# EAGLE board usb-wildcard-r2-panel (EAGLE 5.12)
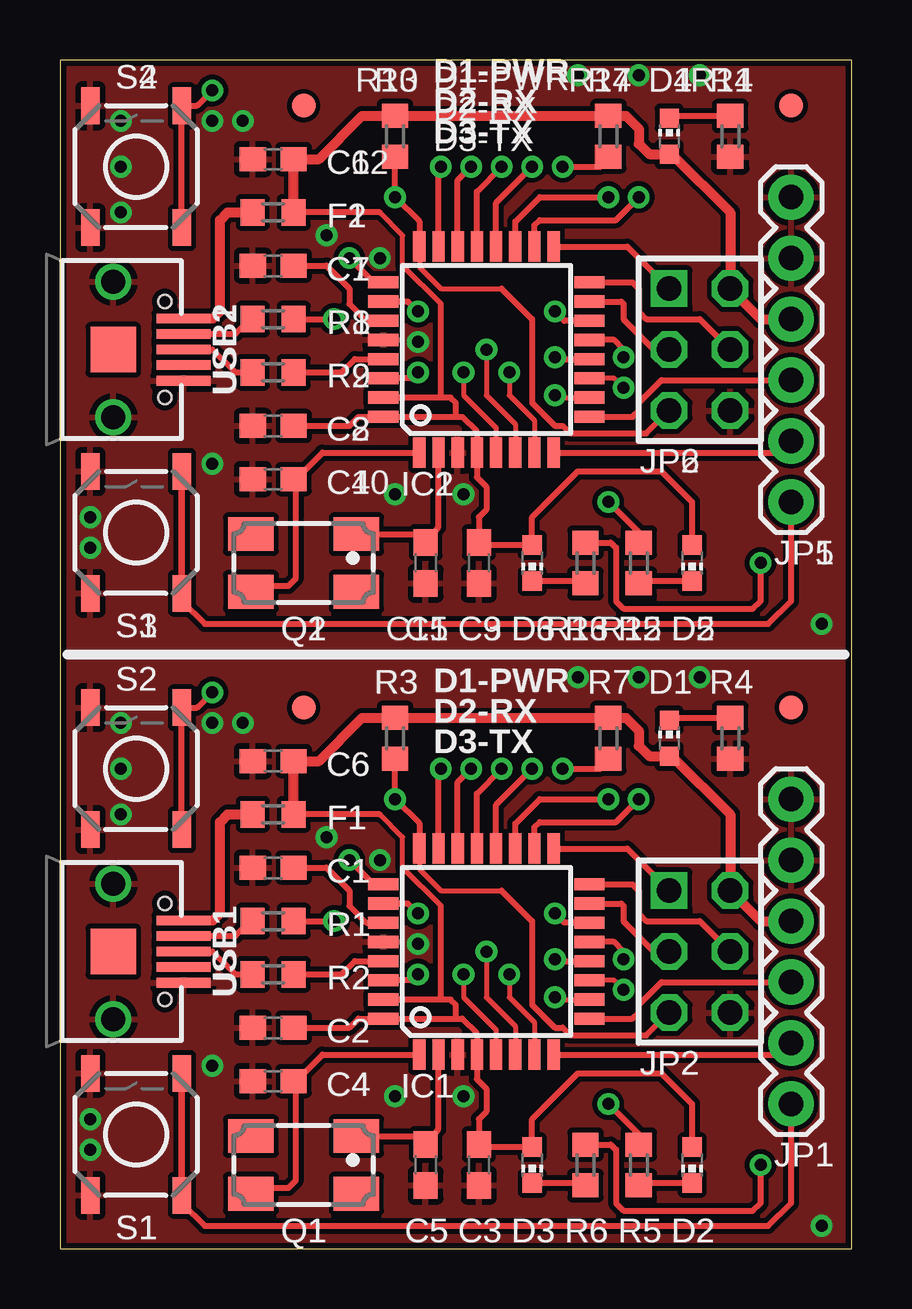
[diagram p0: board, top side]
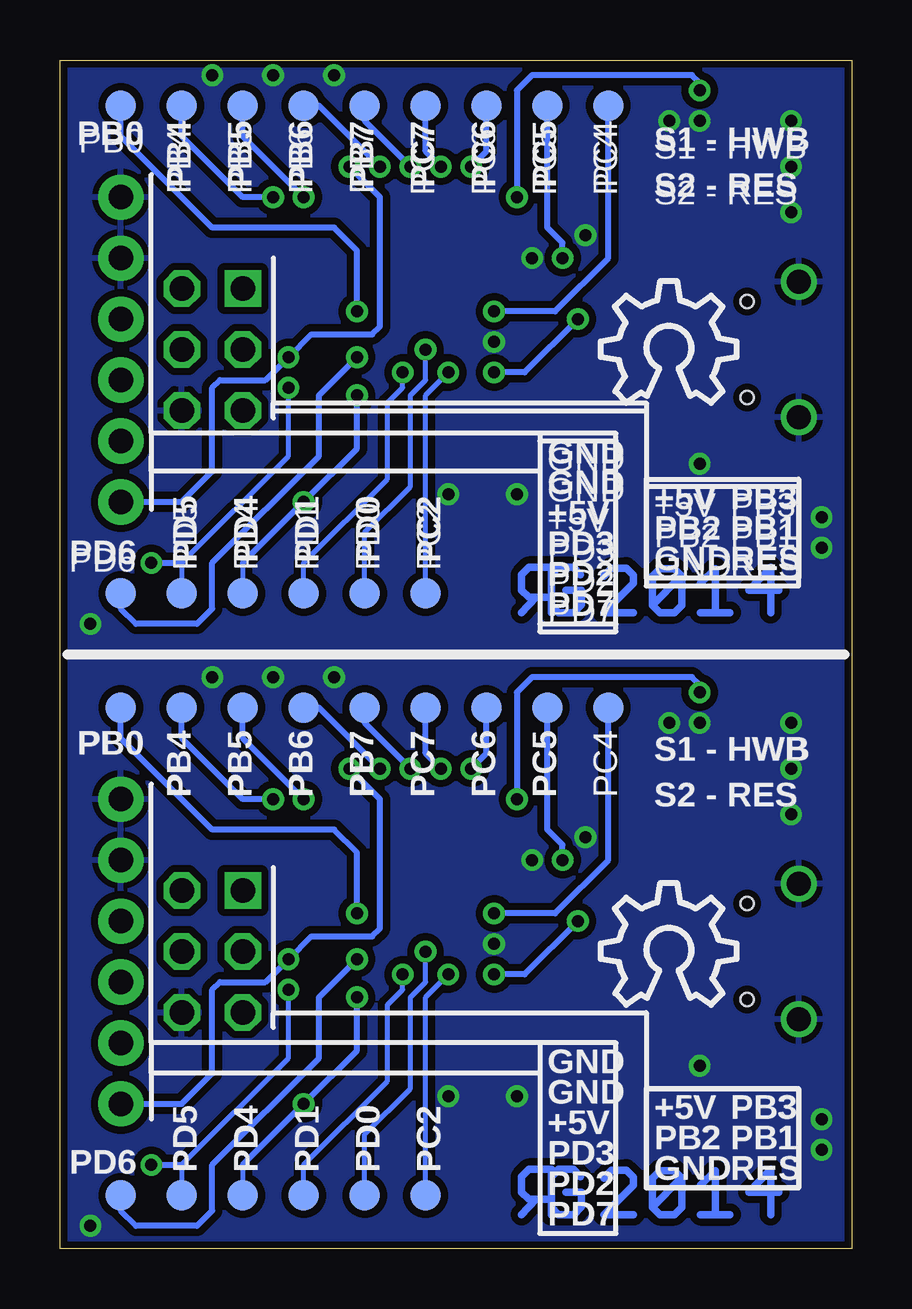
[diagram p1: board, bottom side, seen from below]

Size 33.02 x 49.53 mm. Coordinates in mm from the lower left corner, seen from the top.
Outline: 0,0 33.02,0 33.02,49.53 0,49.53 0,0
Copper layers (1*16): Top 0.035mm / dielectric 1.5mm / Bottom 0.035mm
Design rules "default *": minimum track width 8mil, minimum drill 19mil, track to track 8mil, track to pad 8mil, pad to pad 8mil, via to via 8mil, smd to smd 8mil, copper to edge 10mil, drill to drill 8mil, minimum pad ring 10mil, minimum via ring 8mil, stop-mask expansion 4mil, vias tented up to drill 20mil, thermal gap 10mil

## Footprints (pad centres in the part's own frame; a part is rotated, then mirrored left to right if it is on the bottom)
C0603 = smd 1.1 x 1: 1 -0.85,0; 2 0.85,0
CHIP-LED0603 = smd 0.8 x 0.8: A 0,-0.75; C 0,0.75
R0603 = smd 1 x 1.1: 1 -0.85,0; 2 0.85,0
TQFP32-08 = smd 1.27 x 0.508: 1 -4.293,2.8; 2 -4.293,2; 3 -4.293,1.2; 4 -4.293,0.4; 5 -4.293,-0.4; 6 -4.293,-1.2; 7 -4.293,-2; 8 -4.293,-2.8; 17 4.293,-2.8; 18 4.293,-2; 19 4.293,-1.2; 20 4.293,-0.4; 21 4.293,0.4; 22 4.293,1.2; 23 4.293,2; 24 4.293,2.8 | smd 0.508 x 1.27: 9 -2.8,-4.293; 10 -2,-4.293; 11 -1.2,-4.293; 12 -0.4,-4.293; 13 0.4,-4.293; 14 1.2,-4.293; 15 2,-4.293; 16 2.8,-4.293; 25 2.8,4.293; 26 2,4.293; 27 1.2,4.293; 28 0.4,4.293; 29 -0.4,4.293; 30 -1.2,4.293; 31 -2,4.293; 32 -2.8,4.293
FTDI_BASIC = drill 1.016 pad 1.88 round: CTS 10.16,0; DTR 0,0; GND 12.7,0; RXI 2.54,0; TXO 5.08,0; VCC 7.62,0
AVR-ISP-6 = drill 1.016 square: 1 -2.54,-1.27 | drill 1.016 octagon: 2 -2.54,1.27; 3 0,-1.27; 4 0,1.27; 5 2.54,-1.27; 6 2.54,1.27
FIDUCIAL-1X2.5 = smd 1 x 1: 1 0,0
CTS406 = smd 1.9 x 1.4: 1 -2.2,-1.2; 2 2.2,-1.2; 3 2.2,1.2; 4 -2.2,1.2
TACTILE_SWITCH_SMD = smd 1.524 x 0.762: 1 -2.54,1.905; 2 2.54,1.905; 3 -2.54,-1.905; 4 2.54,-1.905
PAD.03X.05 = smd 1.27 x 1.27: P$1 0,0
USB-MICROB-ALI = smd 0.4 x 2.25: D+ 0,2.925; D- -0.65,2.925; GND 1.3,2.925; ID 0.65,2.925; VCC -1.3,2.925 | drill 1 round: GND@0 -2.825,0; GND@1 2.825,0 | smd 1.9 x 1.9: GND@2 0,0 | hole 0.55: -2,2.15; 2,2.15

## Placement (x,y rotation side)
C1  1u  [C0603]  8.89,15.88 180 top
C2  100n  [C0603]  8.89,9.21 180 top
C3  100n  [C0603]  17.46,3.49 270 top
C4  22p  [C0603]  8.89,6.99 180 top
C5  22p  [C0603]  15.24,3.49 270 top
C6  10u  [C0603]  8.89,20.32 180 top
C7  1u  [C0603]  8.89,40.96 180 top
C8  100n  [C0603]  8.89,34.29 180 top
C9  100n  [C0603]  17.46,28.57 270 top
C10  22p  [C0603]  8.89,32.07 180 top
C11  22p  [C0603]  15.24,28.57 270 top
C12  10u  [C0603]  8.89,45.4 180 top
D1  [CHIP-LED0603]  25.4,21.27 0 top
D2  [CHIP-LED0603]  26.35,3.49 180 top
D3  [CHIP-LED0603]  19.68,3.49 180 top
D4  [CHIP-LED0603]  25.4,46.35 0 top
D5  [CHIP-LED0603]  26.35,28.57 180 top
D6  [CHIP-LED0603]  19.68,28.57 180 top
F1  FUSE  [R0603]  8.89,18.1 0 top
F2  FUSE  [R0603]  8.89,43.18 0 top
IC1  ATMEGA32U2-TQFP  [TQFP32-08]  17.78,12.38 90 top
IC2  ATMEGA32U2-TQFP  [TQFP32-08]  17.78,37.47 90 top
JP1  FTDI_BASICPTH  [FTDI_BASIC]  30.48,6.03 90 top
JP2  AVR-ISP-6  [AVR-ISP-6]  26.67,12.38 270 top
JP3  FIDUCIAL1X2.5  [FIDUCIAL-1X2.5]  30.48,22.54 0 top
JP4  FIDUCIAL1X2.5  [FIDUCIAL-1X2.5]  10.16,22.54 0 top
JP5  FTDI_BASICPTH  [FTDI_BASIC]  30.48,31.11 90 top
JP6  AVR-ISP-6  [AVR-ISP-6]  26.67,37.47 270 top
JP7  FIDUCIAL1X2.5  [FIDUCIAL-1X2.5]  30.48,47.62 0 top
JP8  FIDUCIAL1X2.5  [FIDUCIAL-1X2.5]  10.16,47.62 0 top
LOGO1  OSHW_LOGO_10MILX0200-NT  [OSHW_10X200_NOTEXT]  10.48,10.16 0 bottom
LOGO2  OSHW_LOGO_10MILX0200-NT  [OSHW_10X200_NOTEXT]  10.48,35.24 0 bottom
Q1  16.000 MHz  [CTS406]  10.16,3.49 180 top
Q2  16.000 MHz  [CTS406]  10.16,28.57 180 top
R1  22  [R0603]  8.89,13.65 0 top
R2  22  [R0603]  8.89,11.43 0 top
R3  10K  [R0603]  13.97,21.27 90 top
R4  330  [R0603]  27.94,21.27 90 top
R5  330  [R0603]  24.13,3.49 270 top
R6  330  [R0603]  21.91,3.49 270 top
R7  10K  [R0603]  22.86,21.27 90 top
R8  22  [R0603]  8.89,38.73 0 top
R9  22  [R0603]  8.89,36.51 0 top
R10  10K  [R0603]  13.97,46.35 90 top
R11  330  [R0603]  27.94,46.35 90 top
R12  330  [R0603]  24.13,28.57 270 top
R13  330  [R0603]  21.91,28.57 270 top
R14  10K  [R0603]  22.86,46.35 90 top
S1  [TACTILE_SWITCH_SMD]  3.17,4.76 90 top
S2  [TACTILE_SWITCH_SMD]  3.17,20 90 top
S3  [TACTILE_SWITCH_SMD]  3.17,29.84 90 top
S4  [TACTILE_SWITCH_SMD]  3.17,45.09 90 top
TP1  TEST-POINT3X5  [PAD.03X.05]  20.32,2.22 0 bottom
TP2  TEST-POINT3X5  [PAD.03X.05]  22.86,2.22 0 bottom
TP3  TEST-POINT3X5  [PAD.03X.05]  20.32,27.3 0 bottom
TP4  TEST-POINT3X5  [PAD.03X.05]  22.86,27.3 0 bottom
TP5  TEST-POINT3X5  [PAD.03X.05]  25.4,2.22 0 bottom
TP6  TEST-POINT3X5  [PAD.03X.05]  27.94,2.22 0 bottom
TP7  TEST-POINT3X5  [PAD.03X.05]  30.48,2.22 0 bottom
TP8  TEST-POINT3X5  [PAD.03X.05]  25.4,27.3 0 bottom
TP9  TEST-POINT3X5  [PAD.03X.05]  30.48,22.54 0 bottom
TP10  TEST-POINT3X5  [PAD.03X.05]  27.94,27.3 0 bottom
TP11  TEST-POINT3X5  [PAD.03X.05]  30.48,27.3 0 bottom
TP12  TEST-POINT3X5  [PAD.03X.05]  30.48,47.62 0 bottom
TP13  TEST-POINT3X5  [PAD.03X.05]  27.94,22.54 0 bottom
TP14  TEST-POINT3X5  [PAD.03X.05]  25.4,22.54 0 bottom
TP15  TEST-POINT3X5  [PAD.03X.05]  22.86,22.54 0 bottom
TP16  TEST-POINT3X5  [PAD.03X.05]  20.32,22.54 0 bottom
TP17  TEST-POINT3X5  [PAD.03X.05]  17.78,2.22 0 bottom
TP18  TEST-POINT3X5  [PAD.03X.05]  10.16,22.54 0 bottom
TP19  TEST-POINT3X5  [PAD.03X.05]  12.7,22.54 0 bottom
TP20  TEST-POINT3X5  [PAD.03X.05]  15.24,22.54 0 bottom
TP21  TEST-POINT3X5  [PAD.03X.05]  17.78,22.54 0 bottom
TP22  TEST-POINT3X5  [PAD.03X.05]  27.94,47.62 0 bottom
TP23  TEST-POINT3X5  [PAD.03X.05]  25.4,47.62 0 bottom
TP24  TEST-POINT3X5  [PAD.03X.05]  22.86,47.62 0 bottom
TP25  TEST-POINT3X5  [PAD.03X.05]  20.32,47.62 0 bottom
TP26  TEST-POINT3X5  [PAD.03X.05]  17.78,27.3 0 bottom
TP27  TEST-POINT3X5  [PAD.03X.05]  10.16,47.62 0 bottom
TP28  TEST-POINT3X5  [PAD.03X.05]  12.7,47.62 0 bottom
TP29  TEST-POINT3X5  [PAD.03X.05]  15.24,47.62 0 bottom
TP30  TEST-POINT3X5  [PAD.03X.05]  17.78,47.62 0 bottom
U$1  [RGLOGO_SMALL_2014]  12.38,1.27 0 bottom
U$2  [RGLOGO_SMALL_2014]  12.38,26.35 0 bottom
USB1  USB-U  [USB-MICROB-ALI]  2.22,12.38 270 top
USB2  USB-U  [USB-MICROB-ALI]  2.22,37.47 270 top

## Library data of the parts
C1-C12 F1 F2 R1-R14 = rcl
D1-D6 = led
IC1 IC2 = adafruit
JP1 JP3-JP5 JP7 JP8 S1-S4 TP1-TP30 = SparkFun
JP2 JP6 = avr-5
LOGO1 LOGO2 = ohw-logo
Q1 Q2 = crystal; OC_FARNELL: unknown; OC_NEWARK: unknown
U$1 U$2 = rbg-logos
USB1 USB2 = con-usb-2

## Nets
+5V: C2.1 C3.1 C6.1 D1.A D2.A D3.A F1.2 IC1.4 IC1.31 IC1.32 JP1.VCC JP2.2 R3.2 R7.2
+5V1: C8.1 C9.1 C12.1 D4.A D5.A D6.A F2.2 IC2.4 IC2.31 IC2.32 JP5.VCC JP6.2 R10.2 R14.2
D+: R2.1 USB1.D+
D+1: R9.1 USB2.D+
D-: R1.1 USB1.D-
D-1: R8.1 USB2.D-
DTR: IC1.13 JP1.DTR R7.1 S1.3 S1.4
DTR1: IC2.13 JP5.DTR R14.1 S3.3 S3.4
GND: C1.2 C2.2 C3.2 C4.2 C5.2 C6.2 IC1.3 IC1.28 JP1.CTS JP1.GND JP2.6 R4.1 S1.1 S1.2 S2.1 S2.2 USB1.GND USB1.GND@0 USB1.GND@1
GND1: C7.2 C8.2 C9.2 C10.2 C11.2 C12.2 IC2.3 IC2.28 JP5.CTS JP5.GND JP6.6 R11.1 S3.1 S3.2 S4.1 S4.2 USB2.GND USB2.GND@0 USB2.GND@1
MISO: IC1.17 JP2.1
MISO1: IC2.17 JP6.1
MOSI: IC1.16 JP2.4
MOSI1: IC2.16 JP6.4
N$1: IC2.30 R8.2
N$2: IC1.30 R1.2
N$3: IC1.29 R2.2
N$4: F1.1 USB1.VCC
N$5: IC2.29 R9.2
N$6: C7.1 IC2.27
N$7: F2.1 USB2.VCC
N$8: C1.1 IC1.27
N$9: C4.1 IC1.1 Q1.3
N$10: C5.1 IC1.2 Q1.1
N$11: C10.1 IC2.1 Q2.3
N$12: C11.1 IC2.2 Q2.1
N$13: D4.C R11.2
N$14: D5.C R12.2
N$15: D6.C R13.2
N$23: D1.C R4.2
N$24: D2.C R5.2
N$25: D3.C R6.2
PB0: IC1.14 TP9.P$1
PB1: IC2.21 TP25.P$1
PB2: IC2.20 TP24.P$1
PB3: IC2.19 TP23.P$1
PB4: IC1.18 TP13.P$1
PB5: IC1.19 TP14.P$1
PB6: IC1.20 TP15.P$1
PB7: IC1.21 TP16.P$1
PB8: IC2.18 TP22.P$1
PB9: IC2.14 TP12.P$1
PC1: IC2.5 TP26.P$1
PC2: IC1.5 TP17.P$1
PC3: IC2.26 TP27.P$1
PC4: IC1.26 TP18.P$1
PC5: IC1.25 TP19.P$1
PC6: IC1.23 TP20.P$1
PC7: IC1.22 TP21.P$1
PC8: IC2.25 TP28.P$1
PC9: IC2.23 TP29.P$1
PC10: IC2.22 TP30.P$1
PD0: IC1.6 TP1.P$1
PD1: IC1.7 TP2.P$1
PD2: IC2.6 TP3.P$1
PD3: IC2.7 TP4.P$1
PD4: IC2.12 TP11.P$1
PD6: IC1.12 TP7.P$1
RESET: IC1.24 JP2.5 R3.1 S2.3 S2.4
RESET1: IC2.24 JP6.5 R10.1 S4.3 S4.4
RX: IC1.8 JP1.RXI
RX1: IC2.8 JP5.RXI
RXLED: IC1.10 R5.1 TP5.P$1
RXLED1: IC2.10 R12.1 TP8.P$1
SCK: IC1.15 JP2.3
SCK1: IC2.15 JP6.3
TX: IC1.9 JP1.TXO
TX1: IC2.9 JP5.TXO
TXLED: IC1.11 R6.1 TP6.P$1
TXLED1: IC2.11 R13.1 TP10.P$1

## Tracks (layer width: path | path; a pad name or v marks a point on that pad's centre or on a via)
+5V
  Top 0.203: 15.88,14.29 14.29,15.88 14.29,17.14 13.34,18.1
  Top 0.254: C2.1 12.06,9.21 12.44,9.58 IC1.32 16.51,9.58 | 16.51,9.58 16.77,9.58 17.38,8.97 IC1.4 17.38,7.07 17.78,6.67 17.78,5.71 17.46,5.4 C3.1 17.78,4.24 D3.A 19.68,5.4 21.59,7.3 25.08,7.3 26.35,6.03 D2.A | 15.88,10.38 16.29,10.38 16.51,10.16 16.51,9.58 | 15.88,10.38 IC1.31 | 13.34,18.1 F1.2 | 15.88,10.38 15.88,14.29
  Top 0.406: F1.2 C6.1 10.79,20.32 12.6,22.12 R3.2 R7.2 23.6,22.12 24.13,21.59 24.13,20.95 24.56,20.52 D1.A 25.52,20.52 27.94,18.1 JP2.2 29.21,13.65 JP1.VCC
+5V1
  Top 0.203: 15.88,39.37 14.29,40.96 14.29,42.23 13.34,43.18
  Top 0.254: C8.1 12.06,34.29 12.44,34.66 IC2.32 16.51,34.66 | 16.51,34.66 16.77,34.66 17.38,34.05 IC2.4 17.38,32.15 17.78,31.75 17.78,30.8 17.46,30.48 C9.1 17.78,29.32 D6.A 19.68,30.48 21.59,32.38 25.08,32.38 26.35,31.11 D5.A | 15.88,35.47 16.29,35.47 16.51,35.24 16.51,34.66 | 15.88,35.47 IC2.31 | 13.34,43.18 F2.2 | 15.88,35.47 15.88,39.37
  Top 0.406: F2.2 C12.1 10.79,45.4 12.6,47.2 R10.2 R14.2 23.6,47.2 24.13,46.67 24.13,46.04 24.56,45.6 D4.A 25.52,45.6 27.94,43.18 JP6.2 29.21,38.73 JP5.VCC
D+
  Top 0.254: R2.1 7.3,11.43 6.35,12.38 USB1.D+
D+1
  Top 0.254: R9.1 7.3,36.51 6.35,37.47 USB2.D+
D-
  Top 0.254: R1.1 7.94,13.65 7.32,13.03 USB1.D-
D-1
  Top 0.254: R8.1 7.94,38.73 7.32,38.12 USB2.D-
DTR  (via drill 0.5)
  Top 0.254: IC1.13 23.09,12.78 23.5,12.38 v23.5,12.06 | S1.3 S1.4 5.08,1.91 6.03,0.95 29.53,0.95 30.48,1.91 JP1.DTR | R7.1 22.86,20.32 22.54,20 v20.95,20
  Bottom 0.254: JP1.DTR 27.94,6.03 26.67,7.3 26.67,10.79 26.35,11.11 24.45,11.11 v23.5,12.06 22.54,13.02 20,13.02 19.68,13.34 19.68,18.73 v20.95,20
DTR1  (via drill 0.5)
  Top 0.254: IC2.13 23.09,37.87 23.5,37.47 v23.5,37.15 | S3.3 S3.4 5.08,26.99 6.03,26.04 29.53,26.04 30.48,26.99 JP5.DTR | R14.1 22.86,45.4 22.54,45.09 v20.95,45.09
  Bottom 0.254: JP5.DTR 27.94,31.11 26.67,32.38 26.67,35.88 26.35,36.2 24.45,36.2 v23.5,37.15 22.54,38.1 20,38.1 19.68,38.42 19.68,43.81 v20.95,45.09
GND  (via drill 0.5)
  other vias: 14.92,12.7 6.35,7.62 16.83,6.35 7.62,21.91 11.11,17.14 13.34,16.19 21.59,23.81 26.67,23.81 24.13,23.81 1.27,5.4 1.27,4.13 2.54,18.1 2.54,20 2.54,21.91 13.97,6.35 31.75,0.95 6.35,21.91
  pour Top: -1.27,24.45 34.29,24.45 34.29,-1.59 -1.27,-1.59
  pour Bottom (isolate 0.305): -1.27,24.45 34.29,24.45 34.29,-1.59 -1.27,-1.59
GND1  (via drill 0.5)
  other vias: 14.92,37.78 6.35,32.7 16.83,31.43 7.62,46.99 11.11,42.23 13.34,41.27 21.59,48.9 26.67,48.9 24.13,48.9 1.27,30.48 1.27,29.21 2.54,43.18 2.54,45.09 2.54,46.99 13.97,31.43 31.75,26.04 6.35,46.99
  pour Top: -1.27,51.44 34.29,51.44 34.29,25.08 -1.27,25.08
  pour Bottom (isolate 0.305): -1.27,51.44 34.29,51.44 34.29,25.08 -1.27,25.08
MISO
  Top 0.254: IC1.17 23.65,16.68 JP2.1
MISO1
  Top 0.254: IC2.17 23.65,41.76 JP6.1
MOSI
  Top 0.254: IC1.16 23.87,15.18 24.13,14.92 24.13,13.97 24.45,13.65 26.67,13.65 JP2.4
MOSI1
  Top 0.254: IC2.16 23.87,40.27 24.13,40.01 24.13,39.05 24.45,38.73 26.67,38.73 JP6.4
N$1  (via drill 0.5)
  Top 0.254: IC2.30 14.68,36.27 v14.92,36.51 | R8.2 v11.43,38.73
  Bottom 0.254: v14.92,36.51 13.65,36.51 v11.43,38.73
N$2  (via drill 0.5)
  Top 0.254: IC1.30 14.68,11.18 v14.92,11.43 | R1.2 v11.43,13.65
  Bottom 0.254: v14.92,11.43 13.65,11.43 v11.43,13.65
N$3
  Top 0.254: R2.2 11.75,11.43 12.3,11.98 IC1.29
N$4
  Top 0.406: F1.1 6.99,18.1 6.67,17.78 6.67,13.97 6.38,13.68 USB1.VCC
N$5
  Top 0.254: R9.2 11.75,36.51 12.3,37.06 IC2.29
N$6
  Top 0.254: IC2.27 12.77,38.66 12.06,39.37 12.06,40.01 11.11,40.96 C7.1
N$7
  Top 0.406: F2.1 6.99,43.18 6.67,42.86 6.67,39.05 6.38,38.77 USB2.VCC
N$8
  Top 0.254: IC1.27 12.77,13.58 12.06,14.29 12.06,14.92 11.11,15.88 C1.1
N$9
  Top 0.254: IC1.1 10.95,8.09 9.84,6.99 | 9.84,6.99 9.84,2.86 9.53,2.54 8.21,2.54 Q1.3 | 9.84,6.99 C4.1
N$10
  Top 0.254: IC1.2 15.78,4.98 C5.1 14.99,4.69 Q1.1
N$11
  Top 0.254: IC2.1 10.95,33.17 9.84,32.07 | 9.84,32.07 9.84,27.94 9.53,27.62 8.21,27.62 Q2.3 | 9.84,32.07 C10.1
N$12
  Top 0.254: IC2.2 15.78,30.07 C11.1 14.99,29.77 Q2.1
N$13
  Top 0.254: R11.2 25.5,47.2 D4.C
N$14
  Top 0.254: D5.C 24.13,27.82 R12.2
N$15
  Top 0.254: D6.C 21.81,27.82 R13.2
N$23
  Top 0.254: R4.2 25.5,22.12 D1.C
N$24
  Top 0.254: D2.C 24.13,2.74 R5.2
N$25
  Top 0.254: D3.C 21.81,2.74 R6.2
PB0  (via drill 0.5)
  Top 0.254: IC1.14 21.02,13.58 v20.64,13.97
  Bottom 0.254: v20.64,13.97 20.64,16.51 21.59,17.46 26.67,17.46 30.48,21.27 TP9.P$1
PB1  (via drill 0.5)
  Top 0.254: IC2.21 17.38,44.05 v18.41,45.09
  Bottom 0.254: TP25.P$1 20.32,46.99 v18.41,45.09
PB2  (via drill 0.5)
  Top 0.254: IC2.20 18.18,43.58 v19.68,45.09
  Bottom 0.254: TP24.P$1 22.23,47.62 v19.68,45.09
PB3  (via drill 0.5)
  Top 0.254: IC2.19 18.98,42.79 20,43.81 v22.86,43.81
  Bottom 0.254: v22.86,43.81 25.4,46.35 TP23.P$1
PB4  (via drill 0.5)
  Top 0.254: IC1.18 19.78,17.56 20,17.78 23.18,17.78 v24.13,18.73
  Bottom 0.254: v24.13,18.73 25.4,18.73 27.94,21.27 TP13.P$1
PB5  (via drill 0.5)
  Top 0.254: IC1.19 18.98,17.71 20,18.73 v22.86,18.73
  Bottom 0.254: v22.86,18.73 25.4,21.27 TP14.P$1
PB6  (via drill 0.5)
  Top 0.254: IC1.20 18.18,18.5 v19.68,20
  Bottom 0.254: TP15.P$1 22.23,22.54 v19.68,20
PB7  (via drill 0.5)
  Top 0.254: IC1.21 17.38,18.97 v18.41,20
  Bottom 0.254: TP16.P$1 20.32,21.91 v18.41,20
PB8  (via drill 0.5)
  Top 0.254: IC2.18 19.78,42.64 20,42.86 23.18,42.86 v24.13,43.81
  Bottom 0.254: v24.13,43.81 25.4,43.81 27.94,46.35 TP22.P$1
PB9  (via drill 0.5)
  Top 0.254: IC2.14 21.02,38.66 v20.64,39.05
  Bottom 0.254: v20.64,39.05 20.64,41.59 21.59,42.55 26.67,42.55 30.48,46.35 TP12.P$1
PC1  (via drill 0.5)
  Top 0.203: v16.83,36.51 16.83,35.56 18.18,34.21 IC2.5
  Bottom 0.203: TP26.P$1 17.78,35.56 v16.83,36.51
PC2  (via drill 0.5)
  Top 0.203: v16.83,11.43 16.83,10.48 18.18,9.12 IC1.5
  Bottom 0.203: TP17.P$1 17.78,10.48 v16.83,11.43
PC3  (via drill 0.5)
  Top 0.254: IC2.26 14.51,39.47 v14.92,39.05
  Bottom 0.254: v14.92,39.05 12.38,39.05 10.16,41.27 TP27.P$1
PC4  (via drill 0.5)
  Top 0.254: IC1.26 14.51,14.38 v14.92,13.97
  Bottom 0.254: v14.92,13.97 12.38,13.97 10.16,16.19 TP18.P$1
PC5  (via drill 0.5)
  Top 0.254: IC1.25 13.07,15.18 v12.06,16.19
  Bottom 0.254: v12.06,16.19 12.06,16.83 12.7,17.46 TP19.P$1
PC6  (via drill 0.5)
  Top 0.254: IC1.23 15.78,19.91 v15.88,20
  Bottom 0.254: TP20.P$1 15.24,20.64 v15.88,20
PC7  (via drill 0.5)
  Top 0.254: IC1.22 16.58,19.44 v17.14,20
  Bottom 0.254: TP21.P$1 17.78,20.64 v17.14,20
PC8  (via drill 0.5)
  Top 0.254: IC2.25 13.07,40.27 v12.06,41.27
  Bottom 0.254: v12.06,41.27 12.06,41.91 12.7,42.55 TP28.P$1
PC9  (via drill 0.5)
  Top 0.254: IC2.23 15.78,44.99 v15.88,45.09
  Bottom 0.254: TP29.P$1 15.24,45.72 v15.88,45.09
PC10  (via drill 0.5)
  Top 0.254: IC2.22 16.58,44.52 v17.14,45.09
  Bottom 0.254: TP30.P$1 17.78,45.72 v17.14,45.09
PD0  (via drill 0.5)
  Top 0.203: v17.78,12.38 17.78,10.48 18.98,9.28 IC1.6
  Bottom 0.203: TP1.P$1 20.32,4.76 18.41,6.67 18.41,10.48 17.78,11.11 v17.78,12.38
PD1  (via drill 0.5)
  Top 0.203: IC1.7 19.78,9.43 18.73,10.48 v18.73,11.43
  Bottom 0.203: v18.73,11.43 18.73,10.79 19.37,10.16 19.37,6.99 22.86,3.49 TP2.P$1
PD2  (via drill 0.5)
  Top 0.203: v17.78,37.47 17.78,35.56 18.98,34.36 IC2.6
  Bottom 0.203: TP3.P$1 20.32,29.84 18.41,31.75 18.41,35.56 17.78,36.2 v17.78,37.47
PD3  (via drill 0.5)
  Top 0.203: IC2.7 19.78,34.51 18.73,35.56 v18.73,36.51
  Bottom 0.203: v18.73,36.51 18.73,35.88 19.37,35.24 19.37,32.07 22.86,28.57 TP4.P$1
PD4  (via drill 0.5)
  Top 0.254: IC2.12 20.72,37.06 v20.64,37.15
  Bottom 0.254: v20.64,37.15 22.23,35.56 22.23,33.02 26.67,28.57 26.67,26.67 27.3,26.04 29.84,26.04 30.48,26.67 TP11.P$1
PD6  (via drill 0.5)
  Top 0.254: IC1.12 20.72,11.98 v20.64,12.06
  Bottom 0.254: v20.64,12.06 22.23,10.48 22.23,7.94 26.67,3.49 26.67,1.59 27.3,0.95 29.84,0.95 30.48,1.59 TP7.P$1
RESET  (via drill 0.5)
  Top 0.203: 18.41,14.92 15.88,14.92 14.98,15.82 IC1.24
  Top 0.254: JP2.5 24.45,8.89 21.27,8.89 20.95,9.21 20.64,9.21 19.68,10.16 19.68,13.65 18.41,14.92 | S2.3 S2.4 5.71,22.54 v6.35,23.18 | R3.1 v13.97,18.73 14.98,17.72 IC1.24
  Bottom 0.254: v6.35,23.18 6.35,23.5 6.67,23.81 13.34,23.81 13.97,23.18 v13.97,18.73
RESET1  (via drill 0.5)
  Top 0.203: 18.41,40.01 15.88,40.01 14.98,40.9 IC2.24
  Top 0.254: JP6.5 24.45,33.97 21.27,33.97 20.95,34.29 20.64,34.29 19.68,35.24 19.68,38.73 18.41,40.01 | S4.3 S4.4 5.71,47.62 v6.35,48.26 | R10.1 v13.97,43.81 14.98,42.8 IC2.24
  Bottom 0.254: v6.35,48.26 6.35,48.58 6.67,48.9 13.34,48.9 13.97,48.26 v13.97,43.81
RX
  Top 0.254: IC1.8 30,8.09 JP1.RXI
RX1
  Top 0.254: IC2.8 30,33.17 JP5.RXI
RXLED  (via drill 0.5)
  Top 0.203: IC1.10 20.73,10.38 v20.64,10.48
  Top 0.254: v22.86,6.03 24.13,4.76 R5.1
  Bottom 0.203: 25.4,3.49 TP5.P$1
  Bottom 0.254: v20.64,10.48 20.64,8.26 v22.86,6.03 25.4,3.49
RXLED1  (via drill 0.5)
  Top 0.203: IC2.10 20.73,35.47 v20.64,35.56
  Top 0.254: v22.86,31.11 24.13,29.84 R12.1
  Bottom 0.203: 25.4,28.57 TP8.P$1
  Bottom 0.254: v20.64,35.56 20.64,33.34 v22.86,31.11 25.4,28.57
SCK
  Top 0.254: JP2.3 24.77,12.38 23.5,13.65 23.5,14.29 23.4,14.38 IC1.15
SCK1
  Top 0.254: JP6.3 24.77,37.47 23.5,38.73 23.5,39.37 23.4,39.47 IC2.15
TX
  Top 0.254: IC1.9 23.87,9.58 24.13,9.84 24.13,10.16 25.08,11.11 JP1.TXO
TX1
  Top 0.254: IC2.9 23.87,34.66 24.13,34.92 24.13,35.24 25.08,36.2 JP5.TXO
TXLED  (via drill 0.5)
  Top 0.203: IC1.11 23.11,11.18 v23.5,10.79
  Top 0.254: v29.21,3.49 29.21,1.91 28.89,1.59 23.5,1.59 23.18,1.91 23.18,4.13 22.96,4.34 R6.1
  Bottom 0.203: v23.5,10.79 23.5,7.94 27.94,3.49 TP6.P$1
  Bottom 0.254: v29.21,3.49 27.94,3.49
TXLED1  (via drill 0.5)
  Top 0.203: IC2.11 23.11,36.27 v23.5,35.88
  Top 0.254: v29.21,28.57 29.21,26.99 28.89,26.67 23.5,26.67 23.18,26.99 23.18,29.21 22.96,29.43 R13.1
  Bottom 0.203: v23.5,35.88 23.5,33.02 27.94,28.57 TP10.P$1
  Bottom 0.254: v29.21,28.57 27.94,28.57

## Text on the board
tNames: D1-PWR | D2-RX | D3-TX | D1-PWR | D2-RX | D3-TX
bNames: PC4 | PC5 | PC6 | PC7 | PB7 | PB6 | PB5 | PB4 | PB0 | S1 - HWB | S2 - RES | GND | PB3 | +5V | GND | PB1 | PB2 | +5V | PD6 | PD3 | PC2 | PD0 | PD1 | PD4 | PD5 | RES | GND | PD2 | PD7 | PC4 | PC5 | PC6 | PC7 | PB7 | PB6 | PB5 | PB4 | PB0 | S1 - HWB | S2 - RES | GND | GND | PB3 | +5V | +5V | PB1 | PB2 | PD6 | RES | GND | PD3 | PC2 | PD0 | PD1 | PD4 | PD5 | PD2 | PD7
_tsilk: S2 | R3 | R7 | D1 | R4 | D1-PWR | D2-RX | D3-TX | C6 | F1 | C1 | USB1 | R1 | R2 | C2 | JP2 | IC1 | C4 | JP1 | S1 | Q1 | C5 | C3 | D3 | R6 | R5 | D2 | S2 | R3 | R7 | D1 | R4 | D1-PWR | D2-RX | D3-TX | C6 | F1 | C1 | USB1 | R1 | R2 | C2 | JP2 | IC1 | C4 | JP1 | S1 | Q1 | C5 | C3 | D3 | R6 | R5 | D2
_bsilk: PC4 | PC5 | PC6 | PC7 | PB7 | PB6 | PB5 | PB4 | PB0 | S1 - HWB | S2 - RES | GND | GND | PB3 | +5V | +5V | PB1 | PB2 | PD3 | PD6 | RES | GND | PC2 | PD0 | PD1 | PD4 | PD5 | PD2 | PD7 | PC4 | PC5 | PC6 | PC7 | PB7 | PB6 | PB5 | PB4 | PB0 | S1 - HWB | S2 - RES | GND | GND | PB3 | +5V | +5V | PB1 | PB2 | PD6 | RES | GND | PD3 | PC2 | PD0 | PD1 | PD4 | PD5 | PD2 | PD7